# Altium PCB MicroerMouse.PcbDoc (part 2 of 2)
Units mm, origin at the board's own origin, x right, y up, seen from the top; angles counter-clockwise.
Board outline 87.5 x 72 mm, 2 copper layers (Top Layer, Bottom Layer); 98 components, 71 nets, 347 pads, 248 vias.
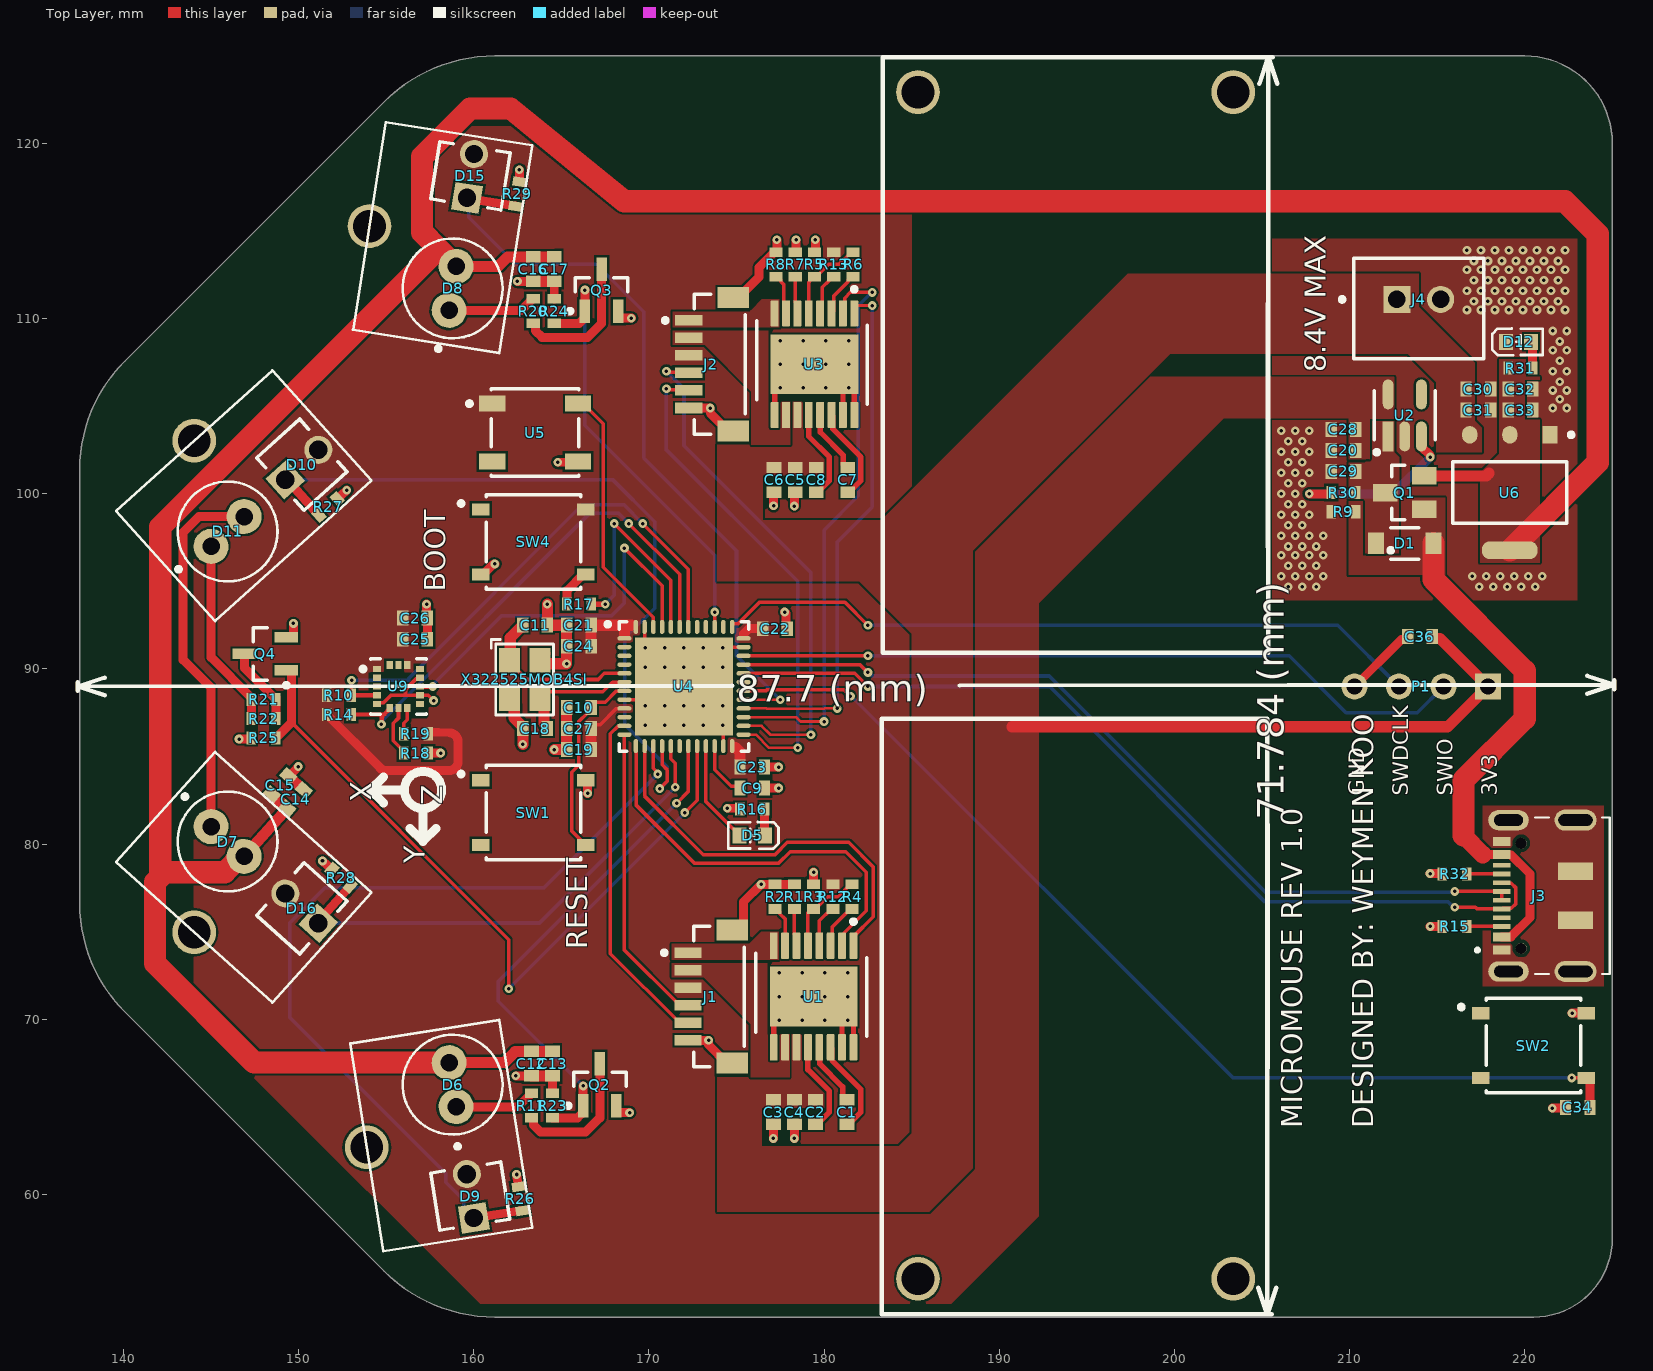
[diagram p0: Top Layer view]

## Silkscreen, mask and mechanical layers (free items; w line width, h text height) (continued)
Top Overlay: (continued)
  lines w0.15: 139.578,78.981 145.232,85.26 154.15,77.231 148.496,70.952 139.578,78.981 ; 139.578,99.019 145.232,92.74 154.15,100.77 148.496,107.048 139.578,99.019 ; 152.952,68.615 161.455,69.962 163.333,58.11 154.829,56.763 152.952,68.615 ; 153.107,109.361 161.455,108.038 163.333,119.891 154.984,121.213 153.107,109.361
  lines w0.203: 154.85,83.85 154.1,83.1 ; 156.35,80.9 157.1,80.15 ; 154.1,83.1 154.1,83.1 ; 154.1,83.1 154.1,83.1 ; 157.1,80.15 157.1,80.15 ; 157.1,80.15 157.1,80.15
  lines w0.254: 137.4,88.746 137.4,89.254 ; 138.925,88.494 137.4,89 ; 138.923,89.51 137.4,89 ; 174.75,89.043 137.4,89 ; 187.75,89.057 225.1,89.1 ; 204.793,54.674 205.3,53.15 ; 204.851,123.41 205.36,124.934 ; 205.046,53.15 205.554,53.15 ; 205.106,124.934 205.614,124.934 ; 205.323,81.145 205.3,53.15 ; 205.337,96.939 205.36,124.934 ; 205.809,54.674 205.3,53.15 ; 205.867,123.41 205.36,124.934 ; 223.575,89.606 225.1,89.1 ; 223.577,88.59 225.1,89.1 ; 225.1,88.846 225.1,89.354 ; 205.3,53.15 183.3,53.15 183.3,87.15 205.3,87.15 205.3,53.15 ; 205.36,124.934 183.36,124.934 183.36,90.934 205.36,90.934 205.36,124.934
  lines w0.508: 154.85,82.35 154.1,83.1 ; 154.85,83.85 154.1,83.1 ; 155.85,83.1 154.1,83.1 ; 156.35,80.9 157.1,80.15 ; 157.1,81.9 157.1,80.15 ; 157.85,80.9 157.1,80.15
  text "8.4V MAX" at 209.029,106.947 h2.03 r90
  text "BOOT" at 158.779,94.414 h2.03 r90
  text "87.7 (mm)" at 175.005,88.129 h1.52 r0.07
  text "X" at 152.539,83.551 h2.03 r270
  text "Z" at 156.593,83.364 h2.03 r270
  text "GND" at 211.109,82.75 h1.5 r90
  text "SWDCLK" at 213.649,82.75 h1.5 r90
  text "SWIO" at 216.189,82.75 h1.5 r90
  text "3V3" at 218.729,82.75 h1.5 r90
  text "71.784 (mm)" at 206.238,81.398 h1.52 r89.95
  text "Y" at 157.6,78.9 h2.03 r90
  text "RESET" at 166.879,74.013 h2.03 r90
  text "MICROMOUSE REV 1.0 /  / DESIGNED BY: WEYMEN KOO" at 211.76,63.794 h2.03 r90

## Text inside footprints (layer, text, board x,y; h text height)
J3: Mechanical 13 "PCB EDGE" at 224.55,82.55 h0.61 r90